# Altium PCB AccumulatorFanController.PcbDoc
Units mil, origin at the board's own origin, x right, y up, seen from the top; angles counter-clockwise.
Board outline 6000 x 4000 mil, 2 copper layers (Top Layer, Bottom Layer); 29 components, 12 nets, 71 pads, 0 vias.
Unrouted connection lines stored in the file: 10.
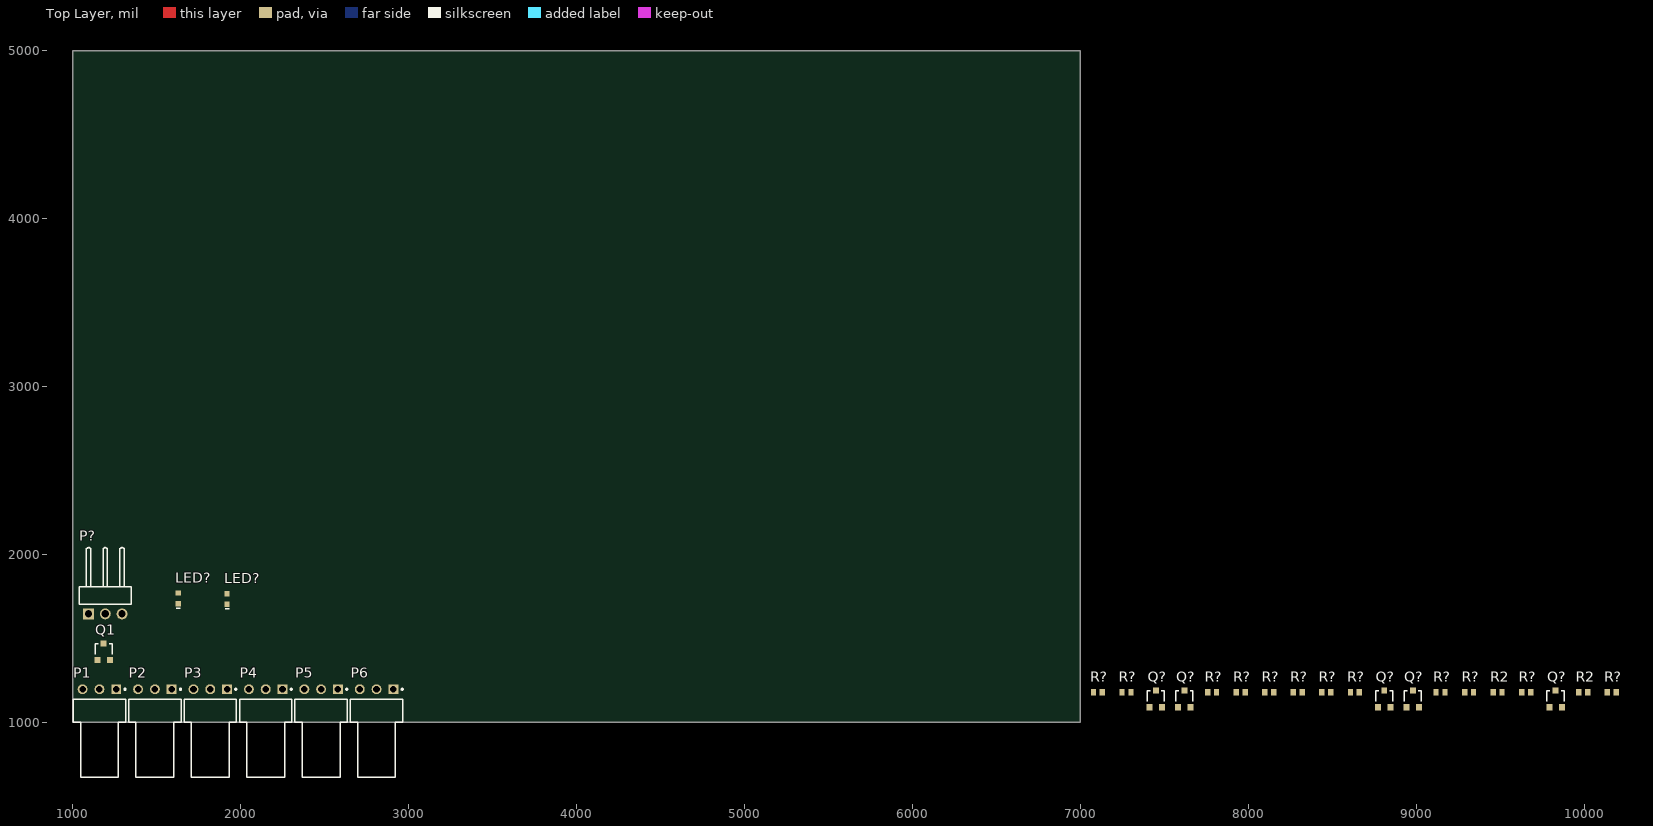
[diagram p0: Top Layer view]
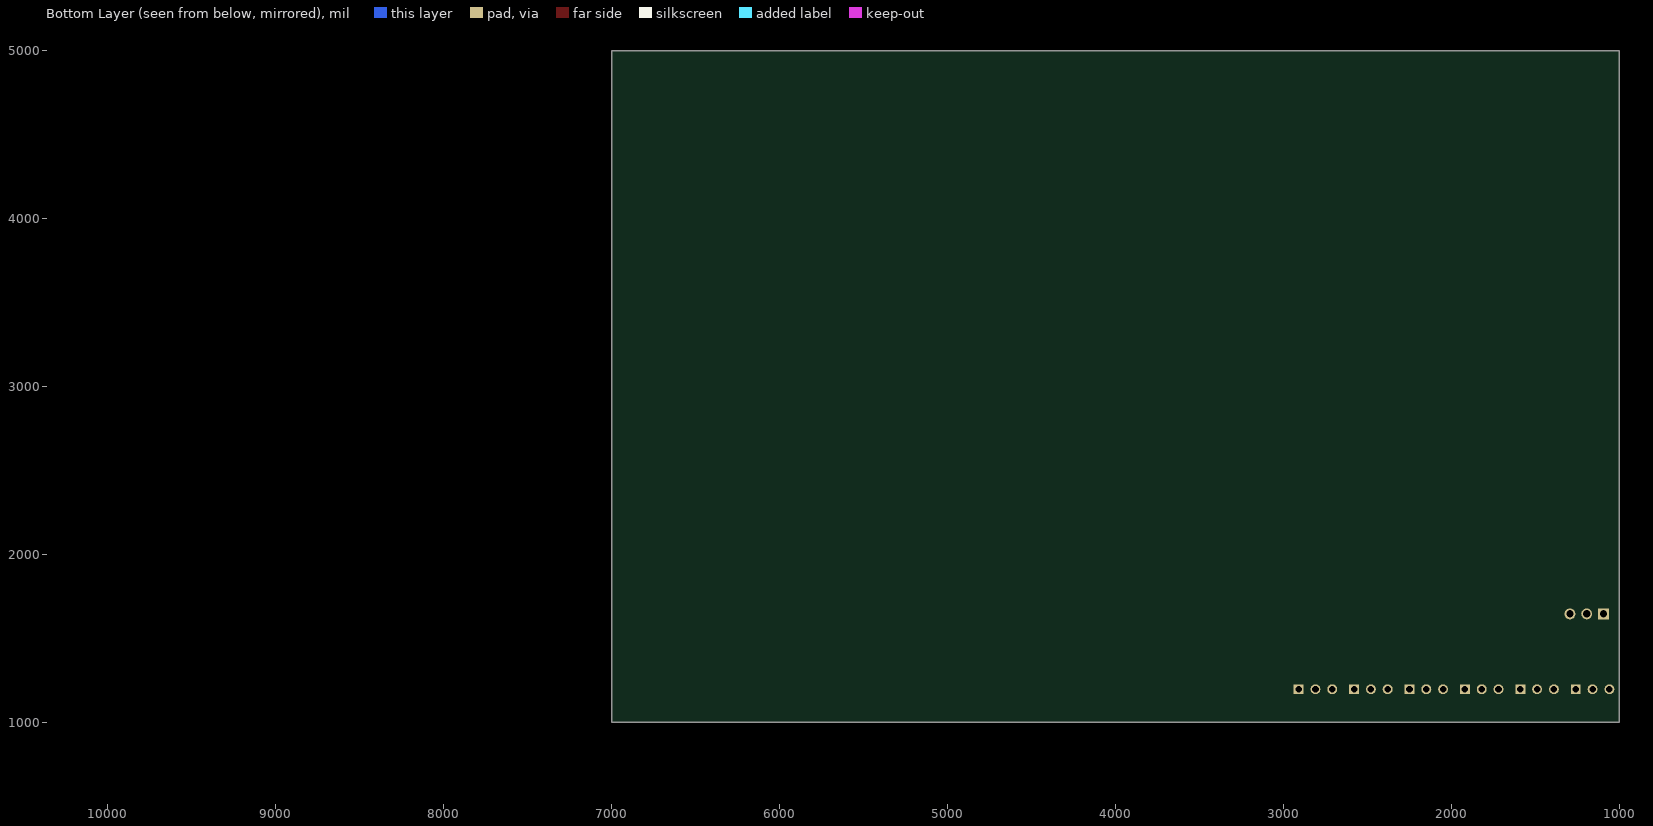
[diagram p1: Bottom Layer view, seen from below]

## Layer stack, top to bottom
Top Solder: solder mask 0.4, Solder Resist, Dk 3.5
Top Layer: signal copper 1.4
Dielectric 1: dielectric 12.6, FR-4, Dk 4.8
Bottom Layer: signal copper 1.4
Bottom Solder: solder mask 0.4, Solder Resist, Dk 3.5

## Board outline
1000,1000 7000,1000 7000,5000 1000,5000

## Design rules (kind name [scope] priority, off if disabled: settings)
Clearance [All] p1: gap=10 ignorepadtopadclearanceinfootprint=FALSE except(0: Arc-Hole Track-Hole SMDPad-Hole THPad-Hole Via-Hole Fill-Hole Poly-Hole Region-Hole Text-Hole)
PolygonConnect [All] p1: connectstyle=Relief reliefconductorwidth=10 reliefentries=4 polygonreliefangle="90 Angle" airgapwidth=10
RoomDefinition AccumulatorFanController [InComponentClass('AccumulatorFanController')] p1: confinementstyle=ConfineIn formatcopy=TRUE lockcomponents=FALSE outline 7045,1060 10240,1060 10240,1320 7045,1320
RoutingVias [All] p1: holewidth=28 width=50 viastyle="Through Hole" minholewidth=28 minwidth=50 maxholewidth=28 maxwidth=50
SolderMaskExpansion [All] p1: expansion=4
Width [All] p1: maxlimit=10 minlimit=10 preferedwidth=10
30 further rules are at their usual default settings.

## Classes and differential pairs
component class AccumulatorFanController: LED? P1 P2 P3 P4 P5 P6 P? Q1

## Components (designator, comment, footprint, x,y, rotation, side; value= is the part's Value field where it differs from the comment)
LED? "150060GS75000" 0603_A 1630,1738.5 r90 top
LED? "150060RS75000" 0603_A 1920,1735 r90 top
P1 "61900319521" 61900319521 1160,905 r0 top
P2 "61900319521" 61900319521 1490,905 r0 top
P3 "61900319521" 61900319521 1820,905 r0 top
P4 "61900319521" 61900319521 2150,905 r0 top
P5 "61900319521" 61900319521 2480,905 r0 top
P6 "61900319521" 61900319521 2810,905 r0 top
P? "61300311021" 61300311021 1195,1755 r180 top
Q1 "2N7002" STM-SOT-23-3_V 1185,1420 r0 top
Q? "2N7002" STM-SOT-23-3_V 7450,1140 r0 top
Q? "2N7002" STM-SOT-23-3_V 8980,1140 r0 top
Q? "2N7002" STM-SOT-23-3_V 9830,1140 r0 top
Q? "2N7002" STM-SOT-23-3_V 8810,1140 r0 top
Q? "2N7002" STM-SOT-23-3_V 7620,1140 r0 top
R2 "10KΩ 0603" RESC1608X55X30NL15T15 9485,1180 r0 top
R2 "330R 0603" RESC1608X55X30NL15T15 9995,1180 r0 top
R? "330R 0603" RESC1608X55X30NL15T15 7955,1180 r0 top
R? "10KΩ 0603" RESC1608X55X30NL15T15 7275,1180 r0 top
R? "330R 0603" RESC1608X55X30NL15T15 9315,1180 r0 top
R? "10KΩ 0603" RESC1608X55X30NL15T15 7105,1180 r0 top
R? "330R 0603" RESC1608X55X30NL15T15 10165,1180 r0 top
R? "10KΩ 0603" RESC1608X55X30NL15T15 8635,1180 r0 top
R? "10KΩ 0603" RESC1608X55X30NL15T15 9655,1180 r0 top
R? "10KΩ 0603" RESC1608X55X30NL15T15 8465,1180 r0 top
R? "330R 0603" RESC1608X55X30NL15T15 7785,1180 r0 top
R? "ERJ3EKF3300V" RESC1608X55X30NL15T15 8125,1180 r0 top
R? "330R 0603" RESC1608X55X30NL15T15 9145,1180 r0 top
R? "ERJ3EKF3300V" RESC1608X55X30NL15T15 8295,1180 r0 top

## Footprints (in the part's own frame and the unit in brackets; to place one, negate y for a bottom-side part, rotate by r counter-clockwise, add the part's x,y. Pads: shape width x height; smd on the part's side, far side on the other; paste and mask are expansions set on the pad)
0603_A [mm] "Chip LED, 2-Leads, Body 1.6x0.8mm, IPC Medium Density"
  rect 0.8x0.8 smd: 1(-0.8,0) 2(0.8,0)
  silkscreen extent -1.5,-0.3 -1.5,0.3, body extent -0.8,-0.4 0.8,0.4, height 0.7
61300311021 [mm] "Pin Header, pitch 2.54 mm, THT, Angled, single row, 3p"
  rect 1.65x1.65 hole 1.1: 1(2.54,2.77)
  round 1.65 hole 1.1: 2(0,2.77) 3(-2.54,2.77)
  silkscreen extent -3.96,-7.27 3.96,1.35, body extent -3.81,-7.27 3.81,3.09, height 2.58
61900319521 [mm] "2.54mm Male Right Angled Locking Header Top Locking, 3p"
  rect 1.5x1.5 hole 1: 1(2.54,7.42)
  round 1.5 hole 1: 2(0,7.42) 3(-2.54,7.42)
  silkscreen extent -3.96,-5.87 3.99,7.54, body extent -3.81,-5.75 3.81,7.77, height 5.83
RESC1608X55X30NL15T15 [mm] "Chip Resistor, 2-Leads, Body 1.60x0.80mm, IPC Medium Density"
  rect 0.8x0.95 smd: 1(-0.675,0) 2(0.675,0)
  body extent -0.87,-0.48 0.87,0.48, height 0.55
STM-SOT-23-3_V [mm] "SOT23, 3-Leads, Body 3.016x2.8mm, Pitch 0.95mm"
  rect 0.9x0.95 smd: 1(-0.95,-1.25) 2(0.95,-1.25) 3(0,1.25)
  silkscreen extent -1.3,-0.38 1.3,1.25, body extent -1.14,-1.25 1.17,1.36, height 1.25

## Part data
LED?: library part CMP-1426-00002-1, "SMD mono-color Chip LED, WL-SMCW, Green", Color=Green, Manufacturer="Wuerth Elektronik", ComponentLink1Description="Manufacturer URL", ComponentLink1URL=http://www.we-online.com, ComponentLink2Description=Datasheet, ComponentLink2URL=http://katalog.we-online.com/led/datasheet/150060GS75000.pdf, PackageReference=0603_A, PartNumber=150060GS75000
LED?: library part CMP-1426-00001-1, "SMD mono-color Chip LED, WL-SMCW, Red", Color=Red, Manufacturer="Wuerth Elektronik", ComponentLink1Description="Manufacturer URL", ComponentLink1URL=http://www.we-online.com, ComponentLink2Description=Datasheet, ComponentLink2URL=http://katalog.we-online.com/led/datasheet/150060RS75000.pdf, PackageReference=0603_A, PartNumber=150060RS75000
P1 P2 P3 P4 P5 P6: library part CMP-1502-00600-1, "Male Top Locking Header WR-WTB, THT, Right Angled, pitch 2.54 mm, 1 x 3 position", Contact Resistance=20mOhm, Manufacturer="Wurth Elektronik", Operating Temperature=-40to105degC, Working Voltage=250VAC, Datasheet URL=https://katalog.we-online.de/em/datasheet/6190xx19521.pdf, Gender=Male, Manufacturer URL=http://www.we-online.de, Mounting Technology=THT, Orientation=RightAngled, Package Reference=61900319521, Packaging=Bag, Part Number=61900319521, Pitch=2.54mm, Position=1x3, Publisher=WurthElektronik
P?: library part CMP-1502-01061-1, "THT Angled Pin Header WR-PHD, Pitch 2.54 mm, Single Row, 3 pins", Contact Resistance=20mOhm, Manufacturer="Wurth Elektronik", Operating Temperature=-40to105degC, Rated Current=3A, Withstanding Voltage=500VAC, Working Voltage=250VAC, Datasheet URL=https://katalog.we-online.de/em/datasheet/6130xx11021.pdf, Gender=Male, Manufacturer URL=http://www.we-online.de, Mounting Technology=THT, Orientation=Angled, Package Reference=61300311021, Packaging=Bag, Part Number=61300311021, Pin Number=3, Pitch=2.54mm, Publisher=WurthElektronik, Row Number=Single
Q1 Q? Q? Q? Q? Q?: library part CMP-0434-00001-1, "N-channel 60 V, 1.8 Ohm, 0.35 A STripFET(TM) II Power MOSFET, SOT23", Manufacturer=STMicroelectronics, ComponentLink1Description="Manufacturer URL", ComponentLink1URL=http://www.st.com/, ComponentLink2Description=Datasheet, ComponentLink2URL=http://www.st.com/st-web-ui/static/active/en/resource/technical/document/datasheet/CD00005134.pdf, DatasheetVersion="Rev. 9, 11/2008", Mounting Technology="Surface Mount", PackageDescription="3-Pin SOT23, 3.016 x 2.8 mm Body, 0.95 mm Pitch", PackageReference=SOT-23, PartNumber=2N7002
R2 R? R? R? R? R?: library part CMP-2000-00435-1, Manufacturer=LCSC, Part Number=0603WAJ0103T5E
R2 R? R? R? R? R?: library part CMP-2000-00435-1, Manufacturer=LCSC, Part Number=0603WAJ0331T5E
R? R?: library part CMP-2000-00435-1, Manufacturer=Panasonic, Part Number=ERJ3EKF3300V

## Nets (pads, with @x,y where several pads share a name; then routed paths per layer and width w, separated by ;. In a path a pad name is that pad's centre, name@x,y a point inside that pad or via, vN(x,y) a via of type N, cw(c..) or ccw(c..) an arc to the next point about the centre after c; other vN are vias at no path point)
+12: P1.2 P2.2 P3.2 P4.2 P5.2 P6.2 P?.2
GND: LED?.1 P?.1 Q1.2
NetLED?_2: LED?.2@1630,1770
NetP1_1: P1.1 Q1.3
NetP2_1: P2.1
NetP3_1: P3.1
NetP4_1: P4.1
NetP5_1: P5.1
NetP6_1: P6.1
NetP?_3: P?.3
NetQ1_1: Q1.1
NetQ?_1: 
pads on no net: LED?.2@1920,1766.5 P1.3 P2.3 P3.3 P4.3 P5.3 P6.3 Q?.1 Q?.2 Q?.3 R2.1 R2.2 R?.1 R?.2